# EAGLE board PCI_Szelcsend (EAGLE 7.2.0)
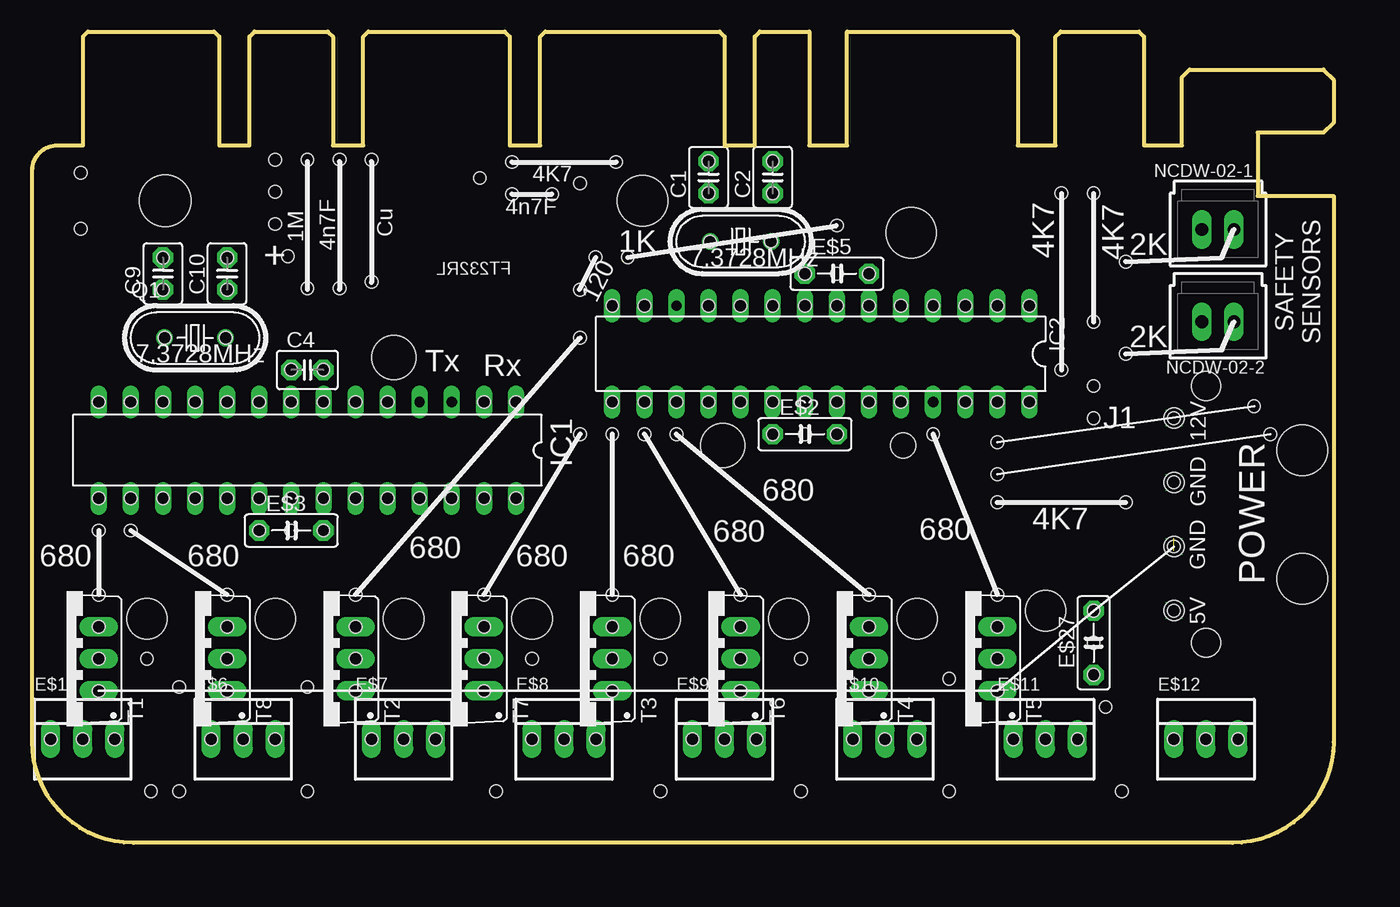
[diagram p0: board, top side]
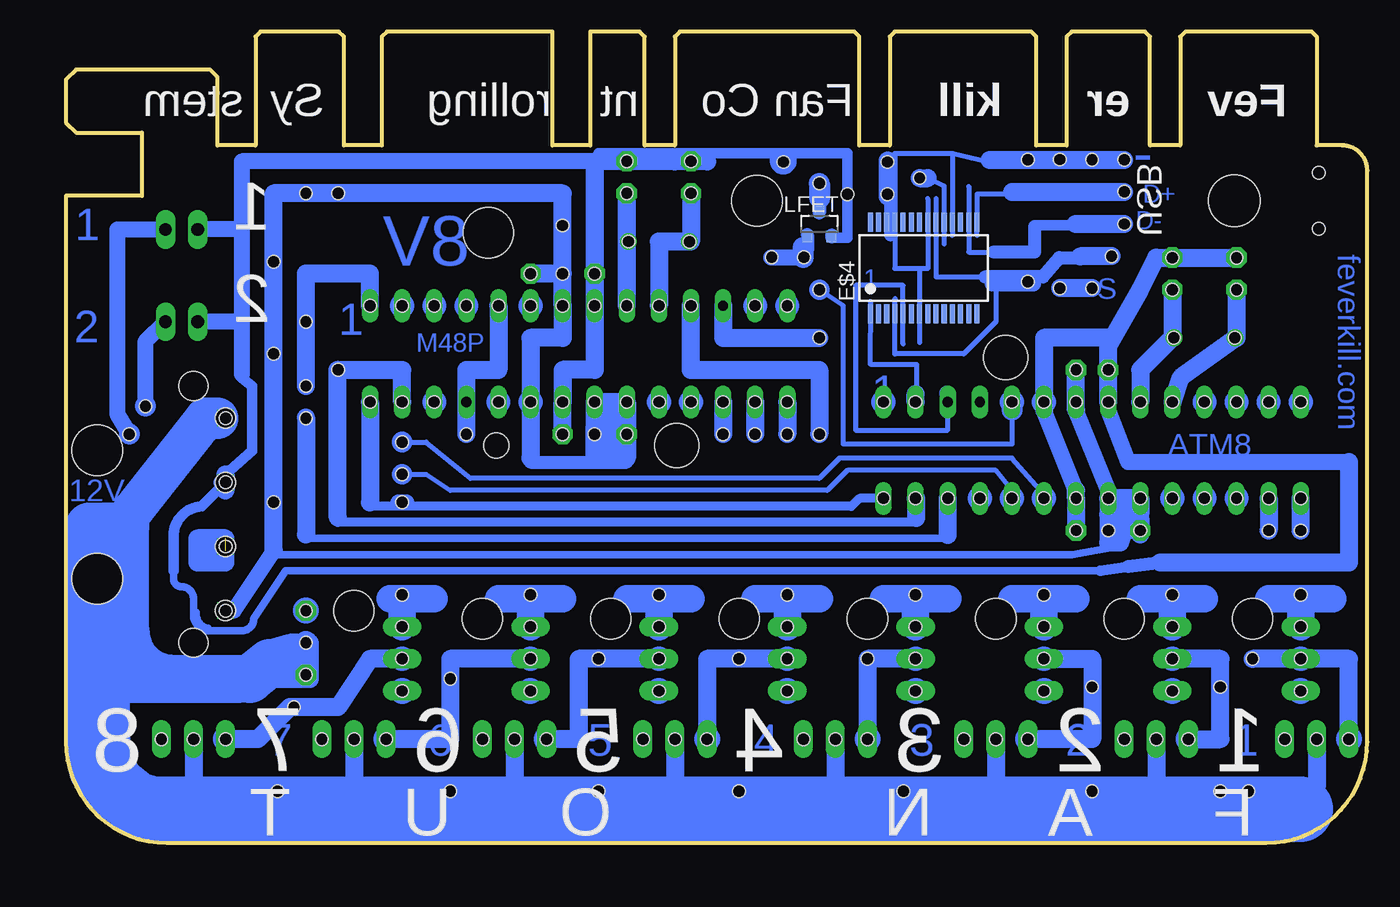
[diagram p1: board, bottom side, seen from below]

Size 103 x 64.19 mm. Coordinates in mm from the lower left corner, seen from the top.
Outline: 4,55.19 4,63.79 4.4,64.19 14.4,64.19 14.8,63.79 14.8,55.19 17.2,55.19 17.2,63.79 17.6,64.19 23.4,64.19 23.8,63.79 23.8,55.19 26.2,55.19 26.2,63.79 26.6,64.19 37.4,64.19 37.8,63.79 37.8,55.19 40.2,55.19 40.2,63.79 40.6,64.19 54.4,64.19 54.8,63.79 54.8,55.19 57.2,55.19 57.2,63.79 57.6,64.19 61.5,64.19 61.5,55.19 64.5,55.19 64.5,64.19 77.6,64.19 78,63.79 78,55.19 81,55.19 81,63.79 81.4,64.19 87.6,64.19 88,63.79 88,55.19 91,55.19 91,60.59 91.6,61.19 102.2,61.19 103,60.39 103,56.99 102.2,56.19 97,56.19 97,51.19 103,51.19 103,8 arc-90 95,0 8,0 arc-90 0,8 0,53.19 arc-90 2,55.19
Outline: 1.9,55.19 3.99,55.19
Copper layers (1*16): Top 0.035mm / dielectric 1.5mm / Bottom 0.035mm
Design rules "default": minimum track width 10mil, minimum drill 24mil, track to track 8mil, track to pad 8mil, pad to pad 8mil, via to via 8mil, smd to smd 8mil, copper to edge 40mil, drill to drill 8mil, minimum pad ring 10mil, minimum via ring 8mil, stop-mask expansion 4mil, vias tented up to drill 0mil, thermal gap 10mil
Holes 1 mm at 76.39,26.94 81.47,37.42 76.39,19.64 66.23,19.64 56.07,19.64 45.91,19.64 35.75,19.64 25.59,19.64 15.43,19.64 5.27,19.64 7.81,24.72 5.27,24.72 45.91,32.34 48.45,32.34 50.99,32.34 43.37,39.96 43.37,32.34 86.55,26.94 26.86,54.04 26.86,44.39 19.24,54.04 19.24,51.5 19.24,48.96 20.24,46.42 21.78,43.88 24.32,43.88 21.78,54.04 24.34,54.07 10.35,46.31 10.35,43.77 15.43,43.77 15.43,46.31 15.3,39.95 10.47,39.96 15.43,34.88 17.97,34.88 53.53,51.39 53.53,53.93 58.61,53.93 58.61,51.39 58.48,47.58 53.64,47.56 56.07,42.5 58.61,42.5 61.15,42.5 20.51,34.88 23.05,34.88 5.27,34.88 7.81,34.88 10.35,34.88 12.89,34.88 25.59,34.88 28.13,34.88 35.75,34.88 38.29,34.88 38.29,27.26 35.75,27.26 33.21,27.26 30.67,27.26 28.13,27.26 25.59,27.26 23.05,27.26 20.51,27.26 17.97,27.26 15.43,27.26 12.89,27.26 10.35,27.26 7.81,27.26 5.27,27.26 45.91,34.88 48.45,34.88 50.99,34.88 53.53,34.88 56.07,34.88 58.61,34.88 61.15,34.88 63.69,34.88 66.23,34.88 68.77,34.88 73.85,34.88 76.39,34.88 78.93,34.88 78.93,42.5 76.39,42.5 73.85,42.5 71.31,42.5 68.77,42.5 66.23,42.5 63.69,42.5 53.53,42.5 48.45,42.5 45.91,42.5 5.27,17.1 5.27,14.56 5.27,12.02 15.43,12.02 15.43,14.56 15.43,17.1 25.59,17.1 25.59,14.56 25.59,12.02 35.75,12.02 35.75,14.56 35.75,17.1 45.91,17.1 45.91,14.56 45.91,12.02 56.07,12.02 56.07,14.56 56.07,17.1 66.23,17.1 66.23,14.56 66.23,12.02 76.39,12.02 76.39,14.56 76.39,17.1 17.97,24.72 23.05,24.72 84.01,41.23 84.01,51.39 81.47,51.39 58.61,32.34 63.69,32.34 84.01,36.15 84.01,33.61 35.43,52.6 61.15,32.34 20.51,24.72 23.05,37.42 20.51,37.42 61.15,45.04 63.69,45.04 66.23,45.04 43.37,52.18 47.14,46.35 63.69,48.85 86.55,45.99 86.55,38.69 96.71,34.56 97.98,32.34 1.46,8.21 4,8.21 6.54,8.21 14.16,8.21 16.7,8.21 19.24,8.21 64.96,8.21 67.5,8.21 70.04,8.21 26.86,8.21 29.4,8.21 31.94,8.21 39.56,8.21 42.1,8.21 44.64,8.21 52.26,8.21 54.8,8.21 57.34,8.21 77.66,8.21 80.2,8.21 82.74,8.21 90.36,8.21 92.9,8.21 95.44,8.21 84.01,18.37 84.01,13.29 44.6,46.35 43.37,43.77 76.39,31.7 76.39,29.16 84.01,15.83 37.97,53.87 37.97,51.33 41.14,51.33 46.22,53.87 9.08,14.56 11.62,12.34 9.4,4.08 11.62,4.08 21.78,12.34 21.78,4.08 39.56,14.56 36.7,4.08 49.72,14.56 49.72,4.08 60.83,14.56 60.83,4.08 72.58,12.97 72.58,4.08 86.23,4.08 84.96,10.75 71.31,32.34 3.84,53.03 3.84,48.58
Holes 3.2 mm at 19.24,17.73 29.4,17.73 39.56,17.73 70.04,17.73 9.08,17.73 49.72,17.73 59.88,17.73 80.2,18.37
Holes 1.6 mm at 90.36,33.61 90.36,28.53 90.36,23.45 90.36,18.37
Holes 4 mm at 48.29,50.81 69.57,48.27
Holes 3.5 mm at 28.61,38.42 54.64,31.44
Holes 2 mm at 68.93,31.44
Holes 4.1 mm at 10.51,50.81

## Footprints (pad centres in the part's own frame; a part is rotated, then mirrored left to right if it is on the bottom)
HC49U70 = drill 0.813: 1 -2.413,0; 2 2.413,0
C2.5-3 = drill 0.813 pad 1.6 octagon: 1 -1.27,0; 2 1.27,0
22-23-2031 = drill 1 long: 1 -2.54,0; 2 0,0; 3 2.54,0
C5B2.5 = drill 0.813 pad 1.6 octagon: 1 -2.54,0; 2 2.54,0
SSOP28 = smd 0.4 x 1.5: 1 -4.225,-3.625; 2 -3.575,-3.625; 3 -2.925,-3.625; 4 -2.275,-3.625; 5 -1.625,-3.625; 6 -0.975,-3.625; 7 -0.325,-3.625; 8 0.325,-3.625; 9 0.975,-3.625; 10 1.625,-3.625; 11 2.275,-3.625; 12 2.925,-3.625; 13 3.575,-3.625; 14 4.225,-3.625; 15 4.225,3.625; 16 3.575,3.625; 17 2.925,3.625; 18 2.275,3.625; 19 1.625,3.625; 20 0.975,3.625; 21 0.325,3.625; 22 -0.325,3.625; 23 -0.975,3.625; 24 -1.625,3.625; 25 -2.275,3.625; 26 -2.925,3.625; 27 -3.575,3.625; 28 -4.225,3.625
MOLEX_CSATL_FEKVO = drill 0.8 square: P$1 -7.62,0; P$2 -2.54,0; P$3 2.54,0; P$4 7.62,0 | hole 1: -7.62,0; -2.54,0; 2.54,0; 7.62,0 | hole 4: -5.08,10.16; 5.08,10.16 | hole 2.3: -10.16,2.54; 10.16,2.54
DIL28-3 = drill 0.813 long: 1 -16.51,-3.81; 2 -13.97,-3.81; 3 -11.43,-3.81; 4 -8.89,-3.81; 5 -6.35,-3.81; 6 -3.81,-3.81; 7 -1.27,-3.81; 8 1.27,-3.81; 9 3.81,-3.81; 10 6.35,-3.81; 11 8.89,-3.81; 12 11.43,-3.81; 13 13.97,-3.81; 14 16.51,-3.81; 15 16.51,3.81; 16 13.97,3.81; 17 11.43,3.81; 18 8.89,3.81; 19 6.35,3.81; 20 3.81,3.81; 21 1.27,3.81; 22 -1.27,3.81; 23 -3.81,3.81; 24 -6.35,3.81; 25 -8.89,3.81; 26 -11.43,3.81; 27 -13.97,3.81; 28 -16.51,3.81
SOT23 = smd 0.8 x 0.9: 1 -0.95,-1; 2 0.95,-1; 3 0,1
70543-02 = drill 1.016 long: 1 -1.27,0; 2 1.27,0
TO220BV = drill 1.016 long: 1 -2.54,-2.54; 2 0,-2.54; 3 2.54,-2.54

## Placement (x,y rotation side)
-  [HC49U70]  56.07,47.58 0 top
C1  [C2.5-3]  53.53,52.66 90 top
C2  [C2.5-3]  58.61,52.66 90 top
C4  [C2.5-3]  21.78,37.42 0 top
C9  [C2.5-3]  10.35,45.04 90 top
C10  [C2.5-3]  15.43,45.04 90 top
E$1  [22-23-2031]  4,8.21 0 top
E$2  [C5B2.5]  61.15,32.34 0 top
E$3  [C5B2.5]  20.51,24.72 0 top
E$4  [SSOP28]  35.12,45.48 0 bottom
E$5  [C5B2.5]  63.69,45.04 0 top
E$6  [22-23-2031]  16.7,8.21 0 top
E$7  [22-23-2031]  29.4,8.21 0 top
E$8  [22-23-2031]  42.1,8.21 0 top
E$9  [22-23-2031]  54.8,8.21 0 top
E$10  [22-23-2031]  67.5,8.21 0 top
E$11  [22-23-2031]  80.2,8.21 0 top
E$12  [22-23-2031]  92.9,8.21 0 top
E$13  [MOLEX_CSATL_FEKVO]  90.36,25.99 270 top
E$27  [C5B2.5]  84.01,15.83 90 top
IC1  MEGA8-P  [DIL28-3]  21.78,31.07 180 top
IC2  [DIL28-3]  62.42,38.69 180 top
LFET  [SOT23]  43.37,48.97 0 bottom
NCDW-02-1  [70543-02]  93.85,48.53 180 top
NCDW-02-2  [70543-02]  93.85,41.23 180 top
Q1  [HC49U70]  12.89,39.96 0 top
T1  [TO220BV]  2.73,14.56 90 top
T2  [TO220BV]  23.05,14.56 90 top
T3  [TO220BV]  43.37,14.56 90 top
T4  [TO220BV]  63.69,14.56 90 top
T5  [TO220BV]  73.85,14.56 90 top
T6  [TO220BV]  53.53,14.56 90 top
T7  [TO220BV]  33.21,14.56 90 top
T8  [TO220BV]  12.89,14.56 90 top

## Library data of the parts
- Q1 = crystal; OC_FARNELL: unknown; OC_NEWARK: unknown
C1 C2 C4 C9 C10 E$2 E$3 E$5 E$27 = capacitor-wima
E$1 E$6-E$12 NCDW-02-1 NCDW-02-2 = con-molex
E$4 = ftdichip
E$13 = MolexCsati
IC1 = atmel; OC_FARNELL: unknown; OC_NEWARK: unknown
IC2 = ic-package
LFET = on-semiconductor
T1-T8 = transistor-neu-to92

## Nets
N$1: E$13.P$4 IC2.7
S$2: C2.1 IC2.9
S$3: C1.1 IC2.10
S$5: C10.1 IC1.9
S$6: C9.1
S$7: E$1.1 T1.2
S$8: IC1.15
S$9: IC1.16
S$10: T1.3
S$11: T8.3
S$12: T2.3
S$13: T7.3
S$14: T3.3
S$15: T6.3
S$16: T4.3
S$17: T5.3
S$18: E$6.1
S$19: IC2.11
S$20: IC2.12
S$21: IC2.15
S$22: IC2.16
S$23: IC2.17
S$24: IC2.5
S$26: E$7.1 T2.2
S$28: IC1.28
S$33: E$8.1 T7.2
S$42: E$9.1 T3.2
S$45: IC1.2
S$46: IC1.14
S$54: IC1.5
S$58: IC2.27
S$60: IC2.1
S$65: E$10.1 T6.2
S$69: IC1.20 IC1.21
S$73: C1.2 C2.2 IC2.8 IC2.22
S$75: NCDW-02-2.1
S$165: E$11.1 T4.2
S$168: E$12.1 T5.2
S$174: E$1.2
S$175: E$6.2
S$176: E$7.2
S$177: E$8.2
S$178: E$9.2
S$179: E$10.2
S$180: E$11.2
S$181: E$12.2
S$188: C9.2 C10.2 IC1.8 IC1.22
S$191: IC2.28
S$195: IC2.20 IC2.21
S$201: E$13.P$2

## Tracks (layer width: path | path; a pad name or v marks a point on that pad's centre or on a via)
GND
  Bottom 0.813: 18.92,21.86 21.14,21.55
  Bottom 1.016: 16.38,22.18 18.92,21.86
  Bottom 1.27: 1.46,30.12 18.92,30.12 20.51,34.24
  Bottom 1.422: 1.46,30.12 1.46,22.18 16.38,22.18
N$1
  Bottom 1.27: 86.55,23.13 89.72,18.37 E$13.P$4
  Bottom 1.422: 63.69,45.04 IC2.7 63.69,39.96 66.23,39.96 66.23,30.44 | 63.69,45.04 63.69,51.39 86.55,51.39 86.55,23.13 | 63.69,45.04 66.23,45.04
S$1
  Bottom 0.7: 35.75,25.35 81.47,25.35
S$2
  Bottom 1.422: IC2.9 C2.1
S$3
  Bottom 1.422: C1.1 53.53,47.58 56.07,47.58 IC2.10
S$4
  Bottom 0.61: 23.37,22.81 86.55,22.81
S$5
  Bottom 1.422: C10.1 15.43,39.96 17.97,37.42 IC1.9
S$6
  Bottom 0.305: 10.35,39.96 10.98,39.96
  Bottom 1.422: C9.1 10.35,39.96 14.8,36.78 15.43,34.88
S$7
  Bottom 1.422: E$1.1 1.46,14.56 T1.2 9.08,14.56
S$8
  Bottom 1.422: 5.27,24.72 IC1.15
S$9
  Bottom 1.422: IC1.16 7.81,24.72
S$10
  Bottom 2.184: 5.27,18.37 T1.3
S$11
  Bottom 2.184: 15.43,19.32 T8.3
S$12
  Bottom 2.184: 25.59,19.32 T2.3
S$13
  Bottom 2.184: 35.75,19.32 T7.3
S$14
  Bottom 2.184: 45.91,19.32 T3.3
S$15
  Bottom 2.184: 56.07,19.32 T6.3
S$16
  Bottom 2.184: 66.23,19.32 T4.3
S$17
  Bottom 2.184: 76.39,19.32 T5.3
S$18
  Bottom 1.422: E$6.1 11.62,8.21 11.62,14.56 15.43,14.56
S$19
  Bottom 1.422: 43.37,32.34 43.37,37.42 53.53,37.42 IC2.11
S$20
  Bottom 1.422: IC2.12 50.99,39.96 43.37,39.96
S$21
  Bottom 1.422: IC2.15 45.91,32.34
S$22
  Bottom 1.422: IC2.16 48.45,32.34
S$23
  Bottom 1.422: IC2.17 50.99,32.34
S$24
  Bottom 1.422: IC2.5 68.77,37.42 71.31,37.42 71.31,32.34
S$25
  Bottom 2.184: 33.21,19.32 38.29,19.32
S$26
  Bottom 1.422: T2.2 21.78,14.56 21.78,8.21 E$7.1
S$27
  Bottom 0.406: 35.65,35.95 35.65,37.85 39.25,37.85
S$28
  Bottom 0.7: IC1.28 40.2,27.26 40.83,26.62 78.93,26.62
S$29
  Bottom 1.422: 29.88,54.03 19.24,54.04
S$30
  Bottom 0.406: 32.84,54.55 32.84,48.04
S$31
  Bottom 1.422: 28.13,51.5 19.24,51.5
S$32
  Bottom 0.406: 34.79,50.97 34.79,45.44 35.44,45.44 | 35.44,45.44 35.44,39.59 | 30.15,53.95 32.83,54.55 37.39,54.55 37.39,45.44 35.44,45.44
S$33
  Bottom 1.422: T7.2 39.56,14.56 E$8.1
S$34
  Bottom 0.813: 26.27,48.85 23.05,48.85
S$35
  Bottom 1.422: 20.24,46.42 22.73,46.4
S$36
  Bottom 1.422: 19.23,48.96 23.07,48.96 23.07,48.95
S$37
  Bottom 1.422: 21.78,43.88 24.32,43.88
S$38
  Bottom 0.406: 36.76,44.11 40.51,44.11 40.51,32.66 33.21,32.66 33.21,34.3
S$39
  Bottom 0.406: 39.34,42.84 39.35,37.89
S$40
  Bottom 0.406: 33.49,47.39 33.49,51.95 34.79,52.61
  Bottom 1.422: 35.44,52.61 34.79,52.61
S$41
  Bottom 1.27: 33.24,35.55 33.22,34.21
S$42
  Bottom 1.422: T3.2 52.26,14.56 E$9.1
S$43
  Bottom 0.406: 30.89,48.04 30.87,51.34 28.27,51.34
S$44
  Bottom 2.184: 12.89,19.32 17.97,19.32 | 2.73,19.32 7.81,19.32
S$45
  Bottom 1.422: IC1.2 35.75,35.52
S$48
  Bottom 1.27: 44.64,46.31 47.18,46.31
  Bottom 1.676: 44.64,46.31 44.64,47.1
S$49
  Bottom 0.406: 34.14,50.97 34.14,44.79 30.24,44.79
  Bottom 1.016: 30.24,44.79 25.66,44.79 24.39,46.3 22.3,46.3
S$51
  Bottom 0.406: 31.54,51.94 31.54,46.74 29.59,46.74
  Bottom 1.016: 29.59,46.74 26.34,46.74 26.34,48.75
S$53
  Bottom 1.676: 43.37,52.18 43.36,51.04
S$54
  Bottom 0.406: 28.13,34.24 28.13,31.55 41.47,31.55 41.47,42.5 43.37,43.77
  Bottom 1.676: IC1.5 28.13,34.24
S$55
  Bottom 1.27: 26.46,44.24 29.64,44.25
S$56
  Bottom 1.422: 35.76,27.26 35.73,27.26 35.73,25.71
S$57
  Bottom 1.422: 33.21,27.27 33.23,27.27 33.23,24.38
S$58
  Bottom 1.422: 81.47,37.42 76.39,37.42 IC2.27
S$59
  Bottom 1.422: 81.47,37.43 81.5,37.43 81.49,25.73
S$60
  Bottom 1.422: IC2.1 78.93,45.04 84.01,45.04 84.01,36.15
S$61
  Bottom 1.422: 84,33.66 84,24.38
S$62
  Bottom 0.406: 36.75,39.49 36.74,44.11
S$63
  Bottom 0.406: 39.34,42.19 39.34,41.54
S$64
  Bottom 0.406: 29.4,43.77 29.4,41.23 31.94,38.69 37.39,38.7
S$65
  Bottom 1.422: T6.2 62.42,14.56 62.42,8.21 E$10.1
S$68
  Bottom 1.016: 44.32,48.12 44.32,46.85
S$69
  Bottom 1.422: 17.97,25.67 17.97,24.72 | 17.97,24.72 17.97,24.4 | 17.97,24.72 19.24,24.72 | 19.24,24.72 19.56,23.77 20.51,23.77 20.51,25.99 | 19.24,24.72 19.24,25.99 | 19.24,25.99 17.97,25.99 IC1.20 IC1.21 20.51,25.99 | 19.24,25.99 20.51,25.99
S$70
  Bottom 1.016: 37.74,51.34 37.74,48.09
S$71
  Bottom 0.813: 42.42,47.9 41.15,47.9 41.15,54.56 45.59,54.56 | 60.83,54.56 45.59,54.56 | 45.59,54.56 45.59,53.93 arc90 46.23,53.3 arc90 46.86,53.93 46.86,54.25
S$72
  Bottom 1.27: 98.93,48.53 95.12,48.53
S$73
  Bottom 1.016: 61.15,53.93 C2.2 54.8,53.93
  Bottom 1.27: 61.15,53.93 89.09,53.93 89.09,48.53 | 89.09,48.53 89.09,41.23 | 89.09,41.23 89.09,37.1 | 89.09,48.53 92.58,48.53 | 89.09,41.23 92.58,41.23
  Bottom 1.422: 52.26,53.93 C1.2 54.8,53.93 61.15,53.93 IC2.8 61.15,37.42 63.69,37.42 IC2.22 63.69,32.34
S$74
  Bottom 2.184: 23.05,19.32 28.13,19.32
S$75
  Bottom 1.27: 96.71,39.64 NCDW-02-2.1
S$161
  Bottom 1.27: 98.93,48.53 98.93,33.93 97.98,32.34
S$162
  Bottom 1.27: 96.71,39.33 96.71,34.56
S$163
  Bottom 2.184: 63.69,19.32 68.77,19.32
S$164
  Bottom 2.184: 73.85,19.32 77.34,19.32
S$165
  Bottom 1.422: T4.2 72.58,14.56 72.58,8.21 E$11.1
S$167
  Bottom 2.184: 53.53,19.32 58.61,19.32
S$168
  Bottom 1.422: T5.2 78.93,14.56 81.47,10.75 85.28,10.75 87.82,8.21 E$12.1
S$169
  Bottom 2.184: 43.37,19.32 48.45,19.32
S$170
  Bottom 1.422: 86.23,12.97 83.69,12.97 83.69,15.83 85.28,15.83 87.5,15.2
S$171
  Bottom 5.2: 90.17,2.65 96.05,2.64 97.66,3.13 99.25,4.4 100.2,5.99 100.52,8.53 100.52,14.24
S$172
  Bottom 0.813: 46.23,54.25 46.23,53.93
S$173
  Bottom 0.61: 19.87,23.45 23.37,22.81
S$174
  Bottom 1.422: E$1.2 4,4.4
S$175
  Bottom 1.422: E$6.2 16.7,4.4
S$176
  Bottom 1.422: E$7.2 29.4,4.4
S$177
  Bottom 1.422: E$8.2 42.1,4.4
S$178
  Bottom 1.422: E$9.2 54.8,4.4
S$179
  Bottom 1.422: E$10.2 67.5,4.4
S$180
  Bottom 1.422: E$11.2 80.2,4.4
S$181
  Bottom 1.422: E$12.2 92.9,4.4
S$182
  Bottom 5.2: 91.65,2.66 5.29,2.66
S$183
  Bottom 1.016: 43.37,51.1 43.37,49.83
S$184
  Bottom 1.016: 42.41,48.09 42.41,47.93
S$185
  Bottom 0.406: 25.59,27.58 28.13,30.44 41.78,30.44 43.37,28.85 70.99,28.85 74.48,31.7 76.39,31.7
S$186
  Bottom 0.406: 28.13,27.89 29.4,29.48 41.15,29.48 42.73,27.89 72.58,27.89 74.48,29.16 76.39,29.16
S$187
  Bottom 1.27: 76.71,26.94 76.07,26.94
S$188
  Bottom 1.016: C9.2 C10.2 16.7,46.31
  Bottom 1.27: 23.05,27.89 25.59,34.24
  Bottom 1.422: 23.05,24.72 IC1.22 23.05,27.89 | C9.2 16.7,46.31 17.97,43.77 20.51,39.33 | IC1.8 20.51,39.33 | 20.51,39.33 20.51,39.96 25.59,39.96 25.59,34.24
S$189
  Bottom 1.27: 20.51,27.89 23.05,34.24
  Bottom 1.422: 23.05,34.24 23.05,37.42
S$191
  Bottom 1.422: IC2.28 78.93,26.94
S$192
  Bottom 1.422: 58.93,33.93 60.52,33.93
S$193
  Bottom 0.406: 37.38,38.69 37.39,43.06
S$194
  Bottom 0.61: 32.89,24.09 83.69,24.09
S$195
  Bottom 1.422: 58.61,31.7 58.61,30.44 61.15,30.44 61.15,31.7 | 61.15,31.7 58.61,31.7 | 58.61,32.98 58.61,31.7 | 61.15,32.98 58.61,32.98 | 61.15,31.7 61.15,32.98 | 58.61,32.98 IC2.20 IC2.21 61.15,32.98
S$196  (1 unrouted)
  Bottom 1.422: 90.36,23.13 92.58,23.13 | 90.36,22.18 92.58,22.18 92.58,24.09 90.36,24.09 90.36,22.18
S$197
  Bottom 1.422: 37.97,54 37.97,51.15
S$198
  Bottom 1.016: 66.23,30.12 58.61,30.12
S$199
  Bottom 3.81: 101.16,15.51 101.16,24.4 | 101.16,25.04 98.3,25.04 98.3,16.78 arc-90 94.49,12.97 | 98.61,12.97 94.49,12.97 | 94.49,12.97 89.41,12.97
S$200
  Bottom 3.3: 97.66,26.31 91.95,33.61 91,33.61
S$201
  Bottom 0.61: 94.49,21.55 94.49,20.91 arc-90 93.85,20.27 arc90 92.9,19.32 92.9,18.05 arc-90 91.63,16.78 89.09,16.78 arc-90 88.14,17.73 85.6,21.55 21.46,21.55 | 91.72,16.98 arc90 92.68,18.25
  Bottom 0.813: 89.09,36.78 88.28,36.12 88.28,31.05 90.36,29.16 | E$13.P$2 92.27,26.62 arc-90 94.49,24.09 94.49,21.55
  Bottom 1.27: E$13.P$2 90.68,28.53
  Bottom 1.422: 90.36,29.16 E$13.P$2 90.36,27.89
S$202
  Bottom 3.81: 86.87,14.24 84.96,14.24
S$203
  Bottom 3.81: 86.87,14.24 88.45,12.97
(copper drawn outside any net)
  shapes: Bottom circle x56, Top circle x1

## Text on the board
Bottom: - | D+ | V8 | D- | 1 | 1 | S | 1 | 2 | M48P | 1 | feverkill.com | ATM8 | 12V | 1 | 2 | 3 | 4 | 5 | 6 | 7 | 8
tPlace: 4K7 | 4n7F | 4n7F | 1M | Cu | 1K | 2K | 120 | 7.3728MHz | 4K7 | 4K7 | + | FT232RL | SAFETY / SENSORS | 2K | 7.3728MHz | Tx | Rx | J1 | POWER | 680 | 4K7 | 680 | 680 | 680 | 680 | 680 | 680 | 680
bPlace: rolling | Fev | er | kill | Fan Co | nt | Sy stem | USB | 1 | 2 | 1 | 2 | 3 | 4 | 5 | 6 | 7 | 8 | F | A | N | O | U | T